# Altium PCB TX.PcbDoc (part 2 of 2)
Units mm, origin at the board's own origin, x right, y up, seen from the top; angles counter-clockwise.
Board outline 57 x 59.5 mm, 4 copper layers (Top Layer, Top Inner Layer, Bottom Inner Layer, Bottom Layer), stack 0.603 mm thick; 71 components, 52 nets, 363 pads, 52 vias.
Unrouted connection lines stored in the file: 5.
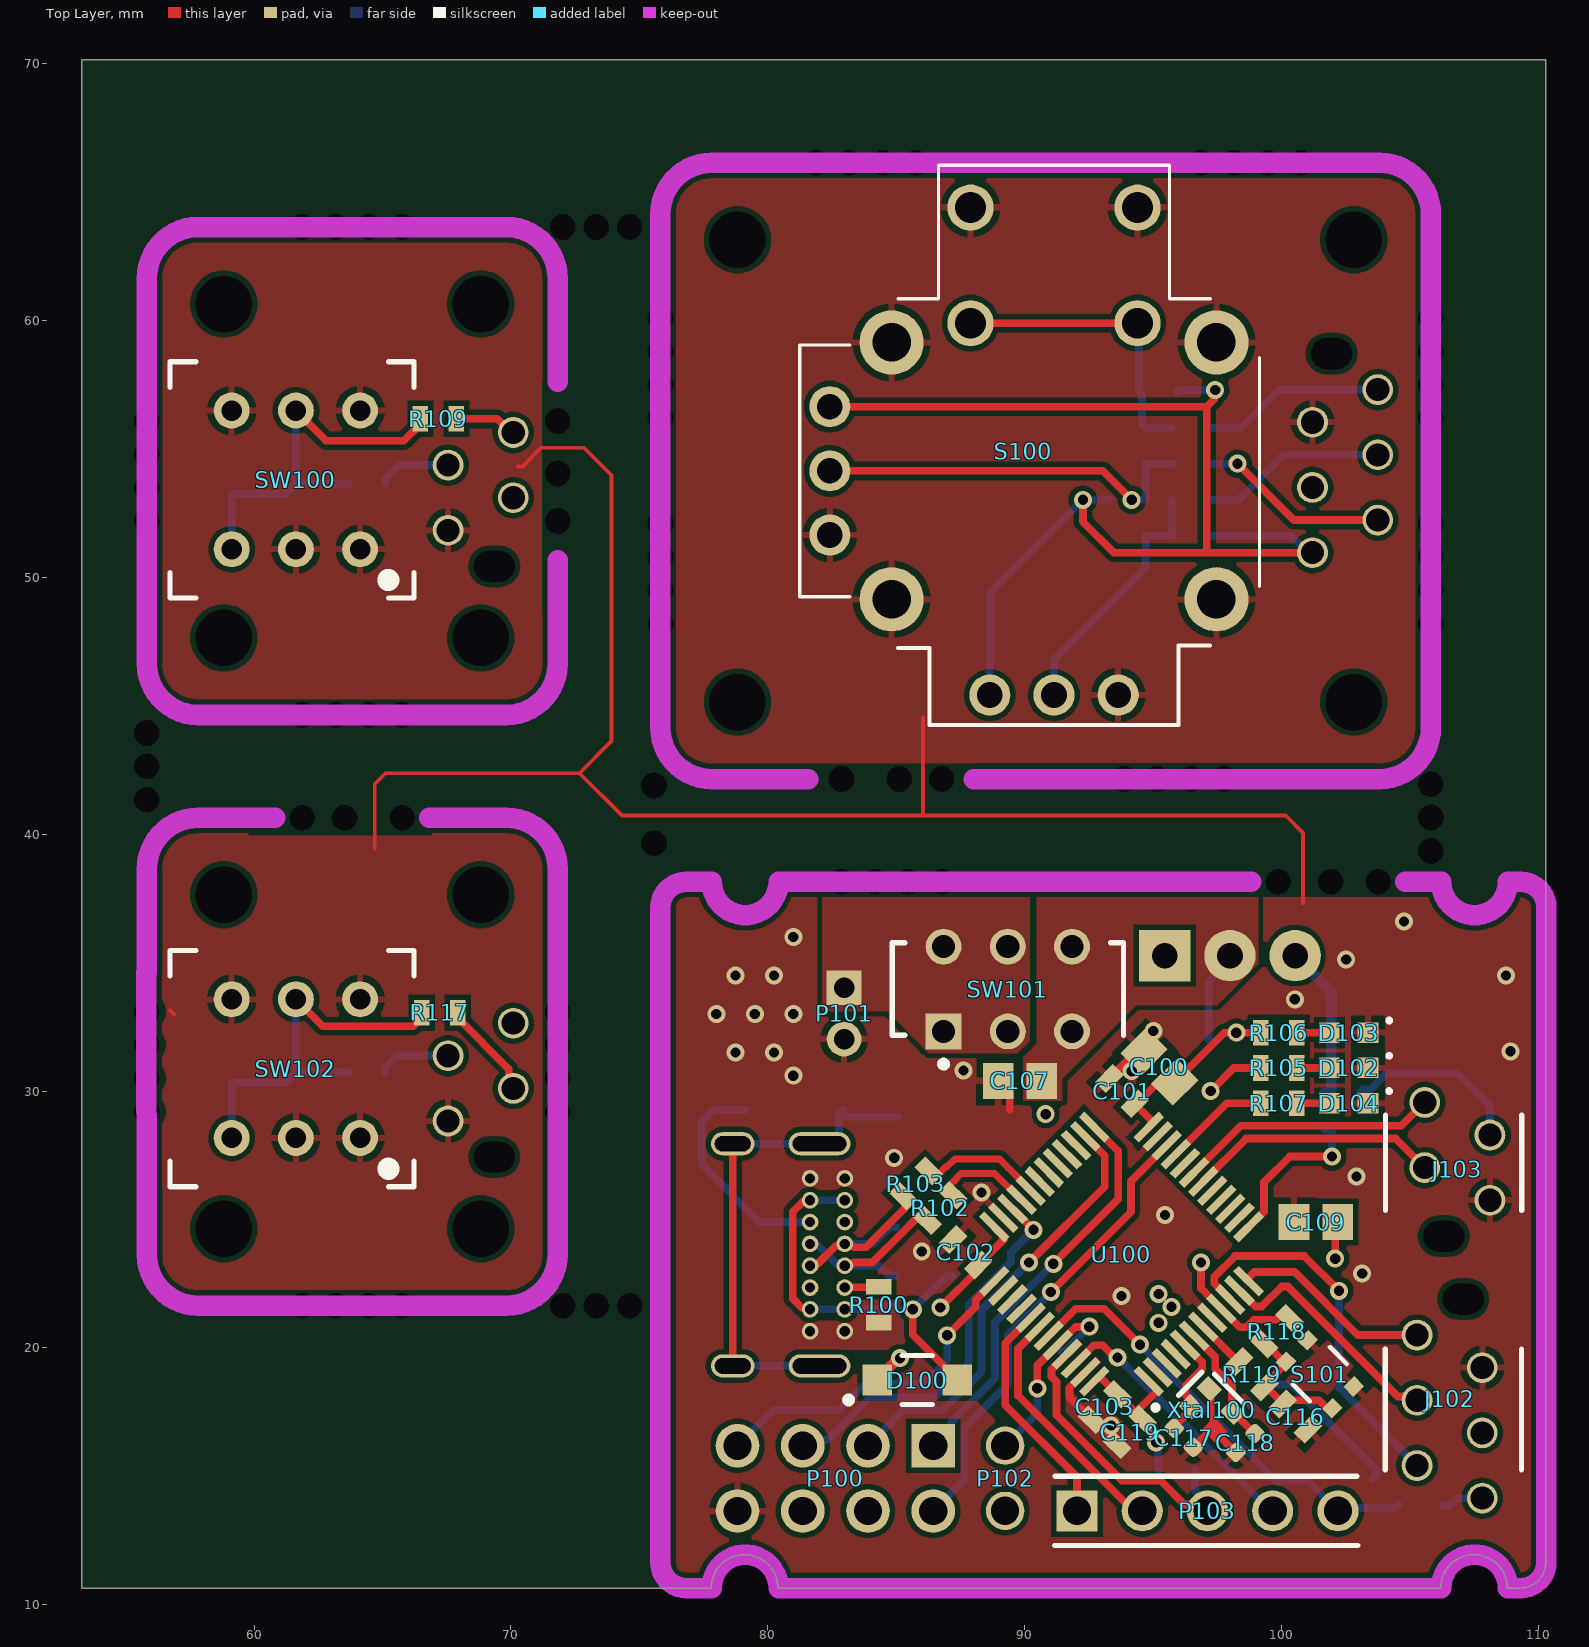
[diagram p0: Top Layer view]

## Polygon pours and split planes (outlines as drawn) (continued)
GND on Bottom Inner Layer "GND_L03_P017" (solid, remove dead copper, pour order 17): 71.802,44.645 55.655,44.645 55.655,63.645 71.845,63.645
GND on Bottom Inner Layer "GND_L03_P025" (solid, remove dead copper, pour order 25): 75.8,66.15 105.825,66.15 105.825,42.15 75.8,42.15
3V3 on Bottom Inner Layer "3V3_L03_P011" (solid, remove dead copper, pour order 11): 80.525,14.175 80.925,14.575 85.85,14.575 85.85,21.478 86.622,22.25 92.318,22.25 97.725,27.689 97.725,32.85 98.8,32.85 98.8,29.75 99.6,28.95 112.15,28.95 112.15,8.825 80.525,8.825
GND on Top Inner Layer "GND_L02_P020" (solid, remove dead copper, pour order 20): 55.802,21.645 71.948,21.645 71.948,40.645 55.758,40.645
GND on Top Inner Layer "GND_L02_P014" (solid, remove dead copper, pour order 14): 74.775,38.15 111.625,38.15 111.625,10.025 74.775,10.025
GND on Top Inner Layer "GND_L02_P016" (solid, remove dead copper, pour order 16): 71.802,44.645 55.655,44.645 55.655,63.645 71.845,63.645
GND on Top Inner Layer "GND_L02_P024" (solid, remove dead copper, pour order 24): 75.8,66.15 105.825,66.15 105.825,42.15 75.8,42.15

## Keep-outs
Keep-Out Layer:
  lines w0.8: 55.811,34.625 55.825,23.645 ccw(c57.825,23.645) 57.825,21.645 69.825,21.645 ccw(c69.825,23.645) 71.825,23.645 71.825,38.645 ccw(c69.825,38.645) 69.825,40.645 66.825,40.645 ; 55.83,34.625 55.825,38.645 cw(c57.825,38.645) 57.825,40.645 60.825,40.645 ; 71.82,50.665 71.825,46.645 cw(c69.825,46.645) 69.825,44.645 66.825,44.645 57.825,44.645 cw(c57.825,46.645) 55.825,46.645 55.825,61.645 cw(c57.825,61.645) 57.825,63.645 66.825,63.645 69.825,63.645 cw(c69.825,61.645) 71.825,61.645 71.83,57.625 ; 81.575,42.15 77.825,42.15 cw(c77.825,44.15) 75.825,44.15 75.825,64.15 cw(c77.825,64.15) 77.825,66.15 103.825,66.15 cw(c103.825,64.15) 105.825,64.15 105.825,44.15 cw(c103.825,44.15) 103.825,42.15 88.025,42.15 ; 98.825,38.15 87.825,38.15 81.825,38.15 80.425,38.15 cw(c79.125,38.15) 77.825,38.15 76.825,38.15 ccw(c76.825,37.15) 75.825,37.15 75.825,11.65 ccw(c76.825,11.65) 76.825,10.65 77.825,10.65 cw(c79.125,10.65) 80.425,10.65 106.225,10.65 cw(c107.525,10.65) 108.825,10.65 109.325,10.65 ccw(c109.325,11.65) 110.325,11.65 110.325,37.15 ccw(c109.325,37.15) 109.325,38.15 108.825,38.15 cw(c107.525,38.15) 106.225,38.15 104.825,38.15

## Other copper
Top Layer:
  pour cut-out: 88.15,17.94 88.878,17.212 88.878,17.08 89.44,17.08 88.58,17.94
  pour cut-out: 99.7,32.975 100.1,32.975 100.1,32.45 99.7,32.45
  pour cut-out: 85.139,26.754 85.421,27.036 87.335,25.123 87.052,24.84
Bottom Layer:
  pour cut-out: 79.4,28.775 80.225,28.775 80.225,28.575 79.4,28.575
  pour cut-out: 85.625,24.05 85.3,24.05 85.3,22.95 86.45,22.95 86.45,23.25 85.625,23.25
Multi-Layer:
  pour cut-out: 59.78,41.257 59.78,39.95 66.93,39.95 66.93,41.257
  pour cut-out: 72.432,57.675 71.208,57.675 71.208,50.525 72.432,50.525
  pour cut-out: 88.125,41.501 88.125,42.762 80.525,42.762 80.525,41.501
  pour cut-out: 98.825,38.775 98.825,37.538 104.825,37.538 104.825,38.775 103.05,38.775

## Silkscreen, mask and mechanical layers (free items; w line width, h text height)
Bottom Overlay:
  drawing of 25 lines, arcs and shapes, not listed
  text ".GlobalProjectTitle" at 97.14,18.635 h0.6
  text ".GlobalProjectTitleAbr" at 97.14,17.435 h0.6
  text ".GlobalRevisionEngineer" at 102.865,16.235 h0.6
  text ".GlobalProjectRevision" at 93.64,15.435 h0.6
  text ".GlobalRevisionDate" at 102.865,15.06 h0.6
Mechanical 1:
  the board outline again, w0.5
Route Tool Path:
  lines w0.5: 55.825,28.145 55.825,23.645 ccw(c57.825,23.645) 57.825,21.645 60.825,21.645 ; 55.825,34.145 55.825,38.645 cw(c57.825,38.645) 57.825,40.645 60.825,40.645 ; 55.825,51.145 55.825,46.645 ccw(c57.825,46.645) 57.825,44.645 60.825,44.645 ; 55.825,57.145 55.825,61.645 cw(c57.825,61.645) 57.825,63.645 60.825,63.645 ; 66.825,21.645 69.825,21.645 ccw(c69.825,23.645) 71.825,23.645 71.825,28.145 ; 66.825,40.645 69.825,40.645 cw(c69.825,38.645) 71.825,38.645 71.825,34.145 ; 66.825,44.645 69.825,44.645 ccw(c69.825,46.645) 71.825,46.645 71.825,51.145 ; 66.825,63.645 69.825,63.645 cw(c69.825,61.645) 71.825,61.645 71.825,57.145 ; 75.575,37.148 75.575,38.398 ; 75.575,37.15 75.575,11.4 ccw(c76.575,11.4) 76.575,10.4 77.825,10.4 cw(c79.125,10.4) 80.425,10.4 106.225,10.4 cw(c107.525,10.4) 108.825,10.4 109.575,10.4 ccw(c109.575,11.4) 110.575,11.4 110.575,37.15 110.575,38.4 106.225,38.4 ; 75.575,37.4 cw(c76.575,37.4) 76.575,38.4 ; 75.825,47.15 75.825,44.15 ccw(c77.825,44.15) 77.825,42.15 81.825,42.15 ; 75.825,53.15 75.825,55.15 ; 75.825,61.15 75.825,64.15 cw(c77.825,64.15) 77.825,66.15 80.825,66.15 ; 76.825,38.4 75.575,38.398 ; 77.825,38.4 ccw(c79.125,38.4) 80.425,38.4 ; 81.825,38.4 80.425,38.4 ; 86.825,66.15 95.825,66.15 ; 87.825,38.4 98.825,38.4 ; 87.825,42.15 92.825,42.15 ; 98.825,42.15 103.825,42.15 ccw(c103.825,44.15) 105.825,44.15 105.825,47.15 ; 101.825,66.15 103.825,66.15 cw(c103.825,64.15) 105.825,64.15 105.825,61.15 ; 104.825,38.4 106.225,38.4 ; 105.825,53.15 105.825,55.15 ; 109.325,38.4 108.825,38.4 cw(c107.525,38.4) 106.225,38.4 ; 109.575,38.4 cw(c109.575,37.4) 110.575,37.4 ; 75.575,38.398 80.425,38.4
  lines w1: 78.519,38.05 ccw(c79.125,38.4) 79.731,38.05 ; 106.919,38.05 ccw(c107.525,38.4) 108.131,38.05

## Dimensions
108.825,38.4 to 108.825,10.4 on Mechanical 1
103.825,66.15 to 103.825,42.15 on Mechanical 1
75.825,64.15 to 105.825,64.15 on Mechanical 1
53.3,70.15 to 110.3,70.15 on Mechanical 1
110.3,70.15 to 109.3,10.65 on Mechanical 1